# Altium PCB Modulo Bluetooth.PcbDoc
Units mm, origin at the board's own origin, x right, y up, seen from the top; angles counter-clockwise.
Board outline 152.4 x 101.6 mm, 2 copper layers (Top Layer, Bottom Layer); 31 components, 26 nets, 106 pads, 156 vias.
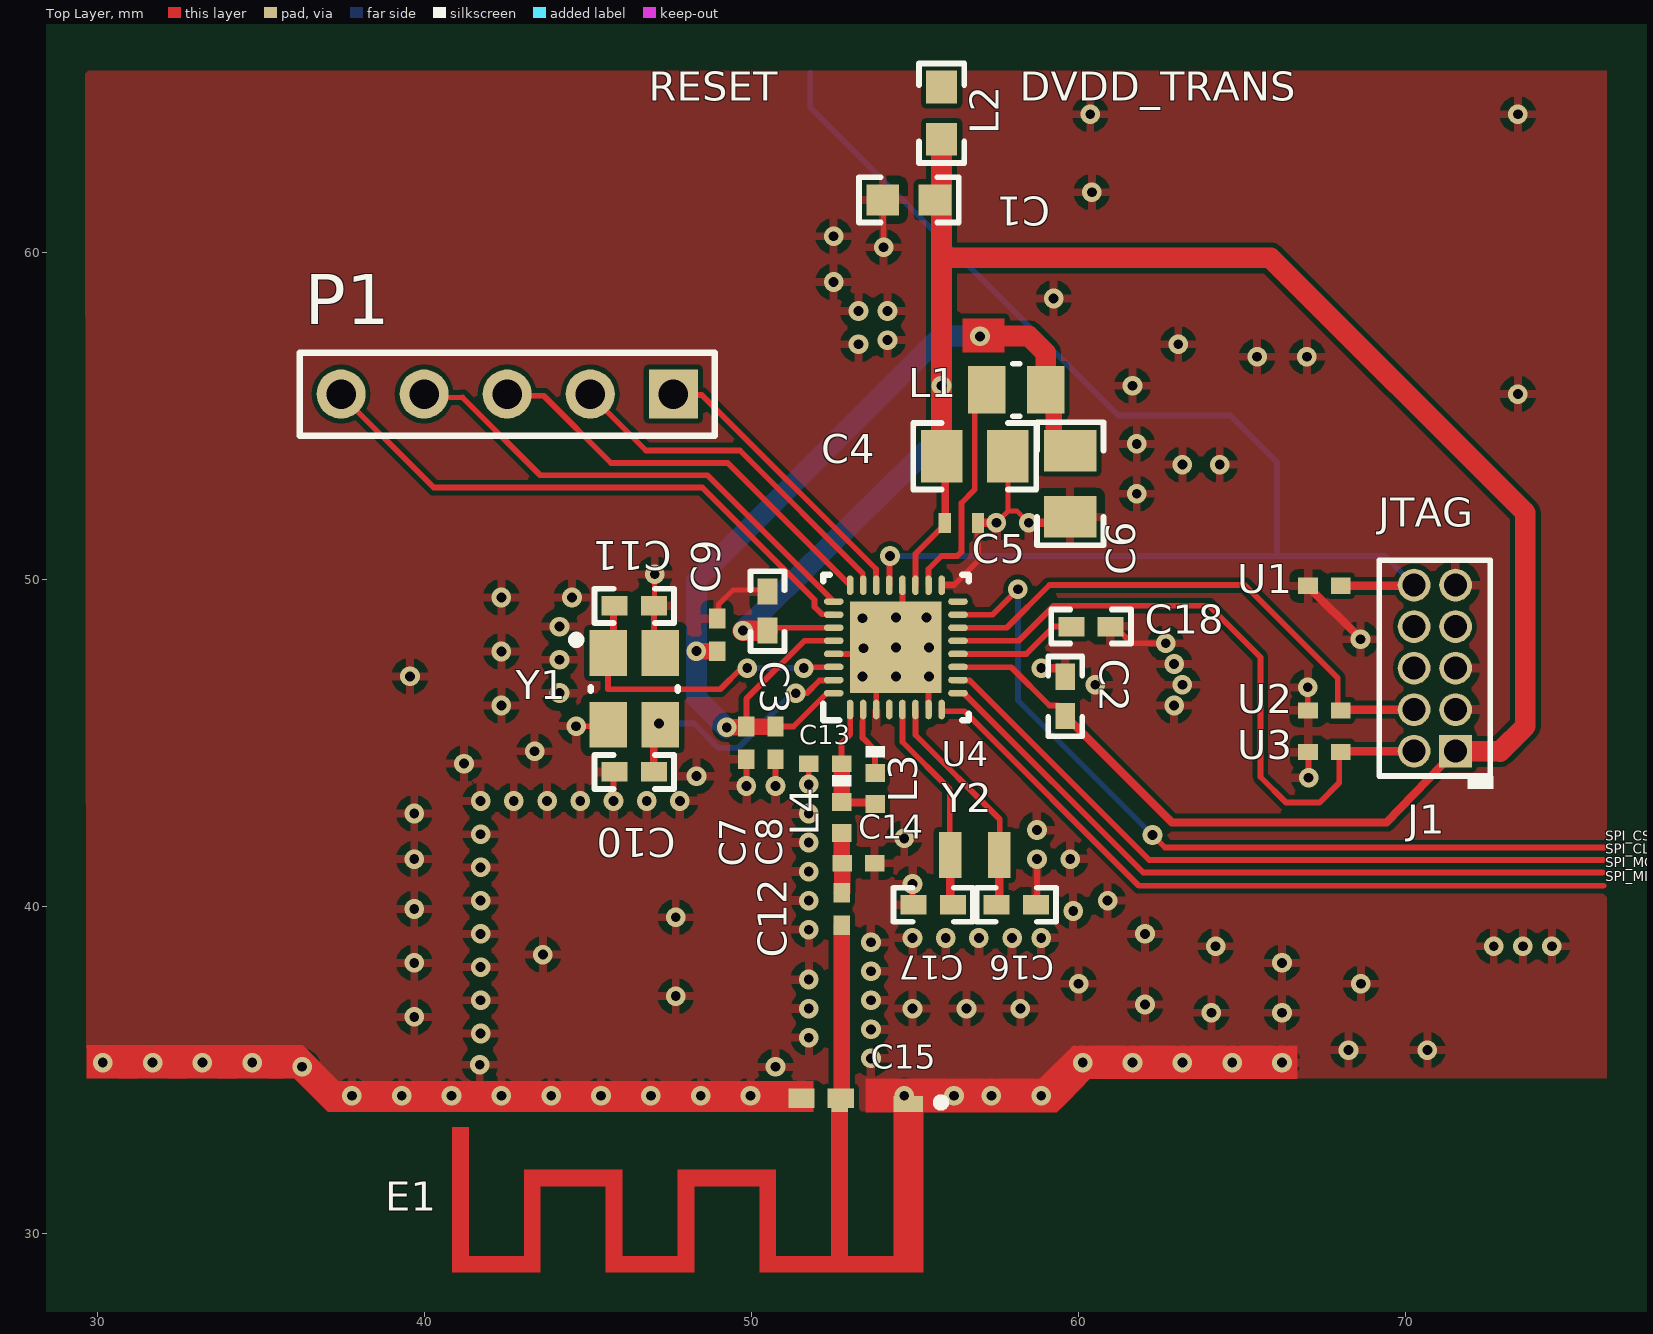
[diagram p0: Top Layer view]
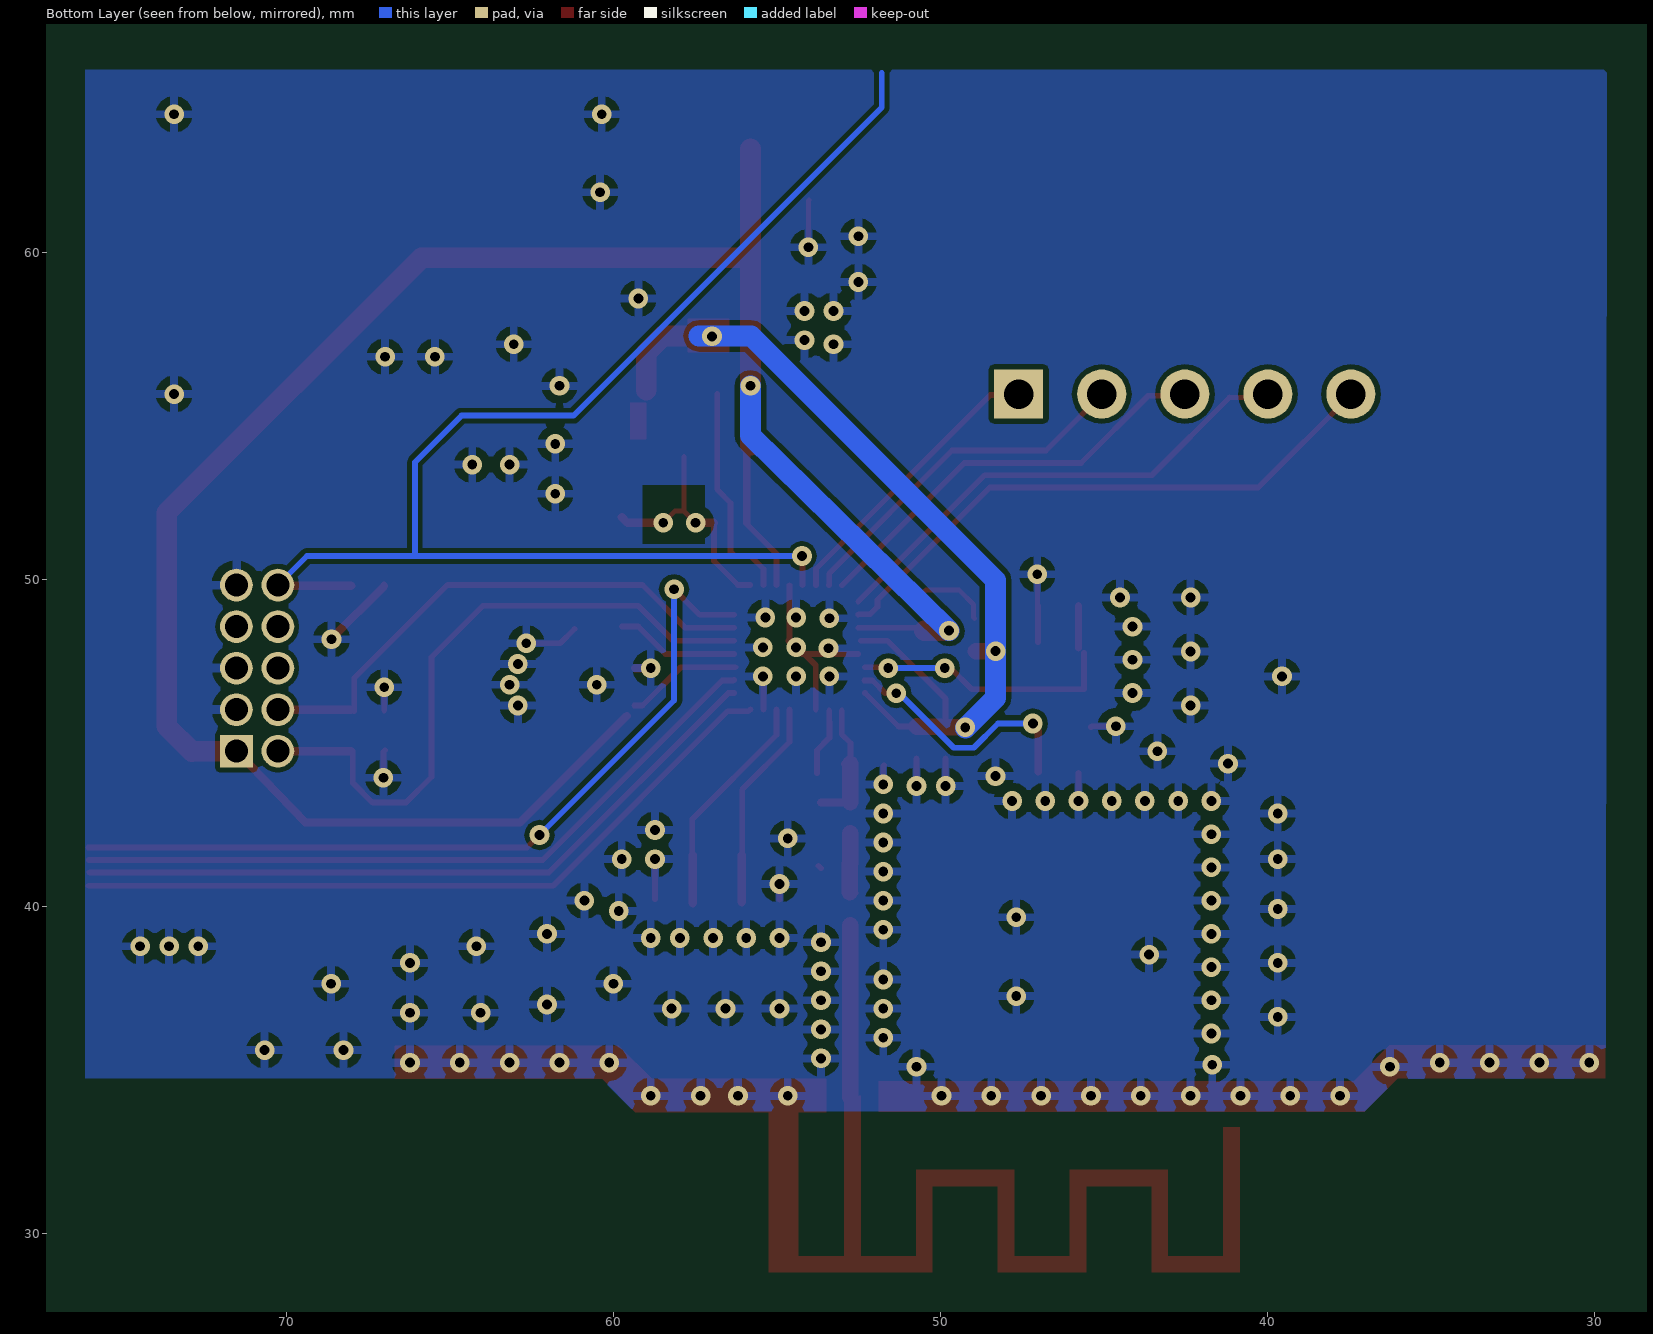
[diagram p1: Bottom Layer view, seen from below]

## Layer stack, top to bottom
Top Solder: solder mask 0.0102, Solder Resist, Dk 3.5
Top Layer: signal copper 0.0356
Dielectric 1: dielectric 0.32, FR-4, Dk 4.8
Bottom Layer: signal copper 0.0356
Bottom Solder: solder mask 0.0102, Solder Resist, Dk 3.5

## Board outline
25.4,25.4 177.8,25.4 177.8,127 25.4,127

## Design rules (kind name [scope] priority, off if disabled: settings)
Clearance [All] p1: gap=0.152 ignorepadtopadclearanceinfootprint=FALSE
ComponentClearance [All] p1 off: gap=0.254 collisioncheckmode=3 verticalgap=0.254 showdistances=FALSE
PolygonConnect [All] p1: connectstyle=Relief reliefconductorwidth=0.254 reliefentries=4 polygonreliefangle="90 Angle" airgapwidth=0.254
RoutingVias [All] p1: holewidth=0.3 width=0.6 viastyle="Through Hole" minholewidth=0.3 minwidth=0.6 maxholewidth=6.3 maxwidth=6.6
SolderMaskExpansion [All] p1: expansion=0.102
Width [All] p1: maxlimit=2 minlimit=0.152 preferedwidth=0.152
29 further rules are at their usual default settings.

## Components (designator, comment, footprint, x,y, rotation, side; value= is the part's Value field where it differs from the comment)
C1 "10uF" 0603 54.825,61.6 r0 top
C2 "0.1uF" 0402 59.607,46.415 r90 top
C3 "0.1uF" 0402 50.5,49.025 r90 top
C4 "10uF" 0805_HV 56.838,53.756 r0 top
C5 "0.1uF" 0402S 56.429,51.724 r0 top
C6 "10uF" 0805_HV 59.759,52.918 r270 top
C7 "0.1uF" 0402L 49.853,44.993 r270 top
C8 "0.1uF" 0402L 50.742,44.993 r270 top
C9 "" 0402L 48.964,48.295 r270 top value=10uF
C10 "" 0402 46.424,44.104 r180 top value=12pF (schematic designator C11)
C11 "" 0402 46.424,49.184 r0 top value=12pF (schematic designator C10)
C12 "GRM1555C1H120JA01D" 0402L 52.774,39.913 r90 top value=12pF
C13 "GRM1555C1H1R2CA01D" 0402L 52.266,44.358 r180 top value=1.2pF
C14 "GRM1555C1H1R2CA01D" 0402L 53.282,41.31 r0 top value=1.2pF
C15 "GRM1555C1H1R2CA01D" 0402 52.139,34.122 r0 top value=1.2pF
C16 "GRM1555C1H120JA01D" 0402 58.108,40.04 r0 top value=12pF (schematic designator C17)
C17 "GRM1555C1H120JA01D" 0402 55.568,40.04 r0 top value=12pF (schematic designator C16)
C18 "GRM155R61A105KE15D" 0402 60.394,48.549 r180 top value=1uF
E1 "ANTENNA_IIFA" ANTENNA_IIFA 54.806,34.198 r180 top net-tie
J1 "" CONN_GRPB052VWVN-RC 70.91,47.279 r90 top
L1 "" 0805_145 58.108,55.788 r0 top value=10uH
L2 "BLM18HE152SN1D" 0603 55.825,64.25 r270 top value="1500 ohm"
L3 "LQG15HS15NJ02D" IND_LQG15H 53.79,43.596 r270 top value=15nH
L4 "LQG15HS2N0S02D" IND_LQG15H 52.774,42.707 r270 top value=2nH
P1 "Header 5" HDR1X5 47.618,55.661 r180 top
U1 "TPD1E10B06DPYR" DPY0002A 67.531,49.794 r180 top
U2 "TPD1E10B06DPYR" DPY0002A 67.531,45.984 r180 top
U3 "TPD1E10B06DPYR" DPY0002A 67.531,44.714 r180 top
U4 "*" RSM0032B_NV 54.425,47.914 r90 top value=Value
Y1 "TSX-3225 24.0000MF20G-AC0-ND" EPSON_TSX-3225 46.424,46.644 r0 top
Y2 "FC-12M 32.7680KA-A3" Epson_FC-12M 56.838,41.564 r0 top

## Footprints (in the part's own frame and the unit in brackets; to place one, negate y for a bottom-side part, rotate by r counter-clockwise, add the part's x,y. Pads: shape width x height; smd on the part's side, far side on the other; paste and mask are expansions set on the pad)
0402 [mm] "0402 from SM-752 data"
  rect 0.8x0.6 smd: 1(-0.6,0) 2(0.6,0)
  silkscreen extent -1.22,-0.52 1.22,0.52, body extent -0.55,-0.3 0.55,0.3, height 0.6
0402L [mm] "0402 from SM-752 data"
  rect 0.6x0.5 smd: 1(-0.5,0) 2(0.5,0)
  body extent -0.55,-0.3 0.55,0.3, height 0.6
0402S [mil] "Based on C0402S footprint from PADS legacy"
  rect 15x24 smd: 1(-20,0) 2(20,0)
  body extent -22,-12 22,12, height 24
0603 [mm] "0603 from SM-752 data"
  rect 1x0.95 smd: 1(-0.8,0) 2(0.8,0)
  silkscreen extent -1.52,-0.69 1.52,0.69, body extent -0.87,-0.47 0.87,0.47, height 1
0805_145 [mm] "0805 / 1.45mm height"
  rect 1.15x1.45 smd: 1(-0.9,0) 2(0.9,0)
  silkscreen extent -0.1,-0.8 0.1,0.8, body extent -1.1,-0.72 1.1,0.72, height 1.45
0805_HV [mil] "0805 with 30mil clearance between pads"
  rect 50x63 smd: 1(-40,0) 2(40,0)
  silkscreen extent -74,-40 74,40, body extent -43,-29 43,29, height 57
ANTENNA_IIFA [mm] "PCB Antenna, 2-Leads"
  rect 0.9x0.5 smd paste-1 mask-1: 1(0,0.25)
  rect 0.5x0.5 smd paste-1 mask-1: 2(2.1,0.25)
  Top Layer region: -0.45,0 -0.45,5.4 4.55,5.4 4.55,2.76 6.55,2.76 6.55,5.4 9.25,5.4 9.25,2.76 11.25,2.76 11.25,5.4 13.95,5.4 13.95,0.96 13.45,0.96 13.45,4.9 11.75,4.9 11.75,2.26 8.75,2.26 8.75,4.9 7.05,4.9 7.05,2.26 4.05,2.26 4.05,4.9 2.35,4.9 2.35,0 1.85,0 1.85,4.9 0.45,4.9 0.45,0
  silkscreen extent -1.1,0.11 -0.9,0.31
CONN_GRPB052VWVN-RC [mm] "SULLINS"
  rect 1x1 hole 0.7 mask+0.08: 1(-2.54,-0.635)
  round 1 hole 0.7 mask+0.08: 2(-2.54,0.635) 3(-1.27,-0.635) 4(-1.27,0.635) 5(0,-0.635) 6(0,0.635) 7(1.27,-0.635) 8(1.27,0.635) 9(2.54,-0.635) 10(2.54,0.635)
  silkscreen extent -3.7,-1.8 3.3,1.7, body extent -3.17,-1.7 3.17,1.7, height 4
DPY0002A [mm] "R-PX2SON-N2"
  rect 0.6x0.5 smd: 1(-0.5,0) 2(0.5,0)
  body extent -0.55,-0.35 0.55,0.35, height 0.4
Epson_FC-12M [mm] "Epson"
  rect 0.7x1.4 smd: 1(-0.75,0) 2(0.75,0)
  body extent -1.05,-0.63 1.05,0.63, height 0.6
EPSON_TSX-3225 [mm] "SMD, 4-Leads, Body 2.65x3.35mm, Height 0.6mm"
  rect 1.15x1.4 smd: 1(-0.8,1.1) 2(-0.8,-1.1) 3(0.8,-1.1) 4(0.8,1.1)
  silkscreen extent -1.9,-0.05 1.33,1.62, body extent -1.33,-1.68 1.33,1.68, height 0.61
HDR1X5 [mm] "Connector; Header; 5 Position"
  rect 1.5x1.5 hole 0.9: 1(0,0)
  round 1.5 hole 0.9: 2(2.54,0) 3(5.08,0) 4(7.62,0) 5(10.16,0)
  silkscreen extent -1.27,-1.27 11.43,1.27
IND_LQG15H [mm] "MuRata"
  rect 0.55x0.6 smd: 1(-0.475,0) 2(0.475,0)
  silkscreen extent -1.3,-0.3 -0.95,0.3, body extent -0.52,-0.27 0.52,0.27, height 0.55
RSM0032B_NV [mm]
  oval 0.6x0.2 smd paste+0 mask+0.051: 1(-1.9,1.4) 2(-1.9,1) 3(-1.9,0.6) 4(-1.9,0.2) 5(-1.9,-0.2) 6(-1.9,-0.6) 7(-1.9,-1) 8(-1.9,-1.4) 17(1.9,-1.4) 18(1.9,-1) 19(1.9,-0.6) 20(1.9,-0.2) 21(1.9,0.2) 22(1.9,0.6) 23(1.9,1) 24(1.9,1.4)
  oval 0.2x0.6 smd paste+0 mask+0.051: 9(-1.4,-1.9) 10(-1,-1.9) 11(-0.6,-1.9) 12(-0.2,-1.9) 13(0.2,-1.9) 14(0.6,-1.9) 15(1,-1.9) 16(1.4,-1.9) 25(1.4,1.9) 26(1,1.9) 27(0.6,1.9) 28(0.2,1.9) 29(-0.2,1.9) 30(-0.6,1.9) 31(-1,1.9) 32(-1.4,1.9)
  rect 2.8x2.8 smd paste-1.387 mask+0.051: 33(0,0)
  silkscreen extent -2.23,-2.23 2.23,2.23, body extent 0,0 0.25,0.25, height 0.25

## Part data
C1: library part C1608X5R1A106M08, "Imported", Manufacturer_Part_Number=C1608X5R1A106M080AC, C="Copyright (C) 2015 Accelerated Designs. All rights reserved", Copyright="Copyright (C) 2015 Accelerated Designs. All rights reserved", Vendor=TDK
C2 C3 C4 C5 C6 C7 C8: library part GRM155R71A104KA0, "Imported", Manufacturer_Part_Number=GRM155R71A104KA01D, Value1=10V, C="Copyright (C) 2015 Accelerated Designs. All rights reserved", Copyright="Copyright (C) 2015 Accelerated Designs. All rights reserved", Vendor=Murata
C9 C10 C11: library part "Cap Semi", "Capacitor (Semiconductor SIM Model)", LatestRevisionDate=29-May-2009, LatestRevisionNote="IPC-7351 Footprint Added.", PackageDescription="Chip Capacitor", PackageReference=C1206, Published=8-Jun-2000, Publisher="Altium Limited"
C12 C16 C17: "CAP, CERM, 12 pF, 50 V, +/- 5%, C0G/NP0, 0402", Cap_Case=0402, Manufacturer=MuRata, Supplier Part Number 1=81-GRM1555C1H120JA1D, TempCo=C0G/NP0, Tolerance_%=5, Value1=Unknown, Value2=50V, ValueDisplayed=12pF, AEC Category=Q200, AEC Qualified=?, Cap_F=0.000000000012, ComponentLink1Description="Datasheet link", ComponentLink1URL=http://search.murata.co.jp/Ceramy/PnsearchViewAction.do?HnOFG=ON&HnNFG=ON&SEL_CNT=50&sLang=en&sKey=GRM1555C1H120JA01D&x=9&y=9&search=startwith, CompType=Capacitor, LatestRevisionDate=2016-02-01, MountType=SMT, PackageReference=0402, PartNumber=GRM1555C1H120JA01D, Polarized=N, Published=2008-06-19, Publisher="Texas Instruments", RoHS=Y, Supplier 1=Mouser, Supplier 2=Farnell, Supplier 3=Newark, Supplier Part Number 2=1828875, Supplier Part Number 3=14T3292, SymbolVersion=2008-07-09, TaMax_C=125, TaMin_C=-55, Technology=Ceramic, U/M=EA, VDC_V=50
C13 C14 C15: "CAP, CERM, 1.2 pF, 50 V, +/- 5%, C0G/NP0, 0402", Cap_Case=0402, Manufacturer=MuRata, Supplier Part Number 1=81-GRM1555C1H1R2CA1D, TempCo=C0G/NP0, Tolerance_%=5, Value1=Unknown, Value2=50V, ValueDisplayed=1.2pF, AEC Category=Q200, AEC Qualified=?, Cap_F=0.0000000000012, ComponentLink1Description="Datasheet link", ComponentLink1URL=http://search.murata.co.jp/Ceramy/image/img/PDF/ENG/GRM1555C1H1R2CA01.pdf, CompType=Capacitor, LatestRevisionDate=2016-02-01, MountType=SMT, PackageReference=0402, PartNumber=GRM1555C1H1R2CA01D, Polarized=N, Published=2008-06-19, Publisher="Texas Instruments", RoHS=Y, Supplier 1=Mouser, SymbolVersion=2008-07-09, TaMax_C=125, TaMin_C=-55, Technology=Ceramic, U/M=EA, VDC_V=50
C18: "CAP, CERM, 1 µF, 10 V, +/- 10%, X5R, 0402", Cap_Case=0402, Manufacturer=MuRata, Supplier Part Number 1=490-3890-1-ND, TempCo=X5R, Tolerance_%=10, Value1=Unknown, Value2=10V, ValueDisplayed=1µF, AEC Category=Q200, AEC Qualified=?, Cap_F=0.000001, ComponentLink1Description="Datasheet link", ComponentLink1URL=http://search.murata.co.jp/Ceramy/PnsearchViewAction.do?HnOFG=ON&HnNFG=ON&SEL_CNT=50&sLang=en&sKey=GRM155R61A105KE15D&x=9&y=9&search=startwith, CompType=Capacitor, LatestRevisionDate=2016-01-22, MountType=SMT, PackageReference=0402, PartNumber=GRM155R61A105KE15D, Polarized=N, Published=2008-06-19, Publisher="Texas Instruments", RoHS=Y, Supplier 1=Digi-Key, Supplier 2=Mouser, Supplier 3=Farnell, Supplier Part Number 2=81-GRM155R61A105KE15, Supplier Part Number 3=1735523, SymbolVersion=2008-07-09, TaMax_C=85, TaMin_C=-55, Technology=Ceramic, U/M=EA, VDC_V=10
E1: "PCB Antenna.  There is nothing to buy or mount.", Manufacturer=N/A, ComponentLink1Description="Datasheet Link", ComponentLink1URL=http://www.ti.com/lit/an/swra117d/swra117d.pdf, CompType=Antenna, LatestRevisionDate=2015-03-27, MountType=N/A, PackageReference="PCB Antenna, 2-Leads", PartNumber=ANTENNA_IIFA, Publisher="Texas Instruments", SymbolCreator=Altium, SymbolVersion=2014-08-20
J1: library part "Header 5X2", "Header, 5-Pin, Dual row", LatestRevisionDate=17-Jul-2002, LatestRevisionNote="Re-released for DXP Platform.", Publisher="Altium Limited"
L1: library part "Inductor Iron", "Magnetic-Core Inductor", LatestRevisionDate=17-Jul-2002, LatestRevisionNote="Re-released for DXP Platform.", PackageDescription="Axial Device, Thru-Hole; 2 Leads; 0.9 in Pin Spacing", PackageReference=AXIAL-0.9, Published=24-Mar-1999, Publisher="Altium Limited"
L2: "Ferrite Bead, 1500 ohm @ 100 MHz, 0.5 A, 0603", Manufacturer=MuRata, Supplier Part Number 1=490-5216-1-ND, Value1="0.5 ohm", Value2=0.5A, ComponentLink1Description="Datasheet link", ComponentLink1URL=http://search.murata.co.jp/Ceramy/image/img/PDF/ENG/L0110S0101BLM18H.pdf, CompType="Ferrite Bead", DCR_ohm=0.5, Imax_A=0.5, LatestRevisionDate=2016-02-02, MountType=SMT, PackageReference=0603, PartNumber=BLM18HE152SN1D, Published=2014-04-30, Publisher="Texas Instruments", RoHS=Y, Supplier 1=Digi-Key, Supplier 2=Mouser, Supplier 3=Farnell, Supplier Part Number 2=81-BLM18HE152SN1D, Supplier Part Number 3=2443237RL, SymbolVersion=2009-06-02, Ztyp@1GHz_Ohm=1500, ZTyp@100MHz_Ohm=1500
L3: "Inductor, Multilayer, Air Core, 15 nH, 0.3 A, 0.32 ohm, SMD", Manufacturer=MuRata, Supplier Part Number 1=490-2625-1-ND, Value1="0.32 ohm", Value2=0.3A, ValueDisplayed=15nH, AEC Category=Q200, AEC Qualified=?, ComponentLink1Description="Datasheet link", ComponentLink1URL=http://search.murata.co.jp/Ceramy/image/img/PDF/ENG/L0075S0083LQG15HS.pdf, CompType=Inductor, DCR_ohm=0.32, Imax_A=0.3, Ind_H=15.0E-9, Irms="0.3A @ C rise", Isat="0.3A @ % inductance drop", LatestRevisionDate=2016-01-08, Material="Air Core", MountType=SMT, PackageReference="0402 polarized", PartNumber=LQG15HS15NJ02D, Published=2008-06-26, Publisher="Texas Instruments", RoHS=Y, Supplier 1=Digi-Key, Supplier 2=Mouser, Supplier Part Number 2=81-LQG15HS15NJ02D, SymbolVersion=2008-07-23, Technology=Multilayer
L4: "Inductor, Multilayer, Air Core, 2 nH, 0.3 A, 0.1 ohm, SMD", Manufacturer=MuRata, Supplier Part Number 1=490-6569-1-ND, Value1="0.1 ohm", Value2=0.3A, ValueDisplayed=2nH, AEC Category=Q200, AEC Qualified=?, ComponentLink1Description="Datasheet link", ComponentLink1URL=http://search.murata.co.jp/Ceramy/image/img/PDF/ENG/L0075S0083LQG15HS.pdf, CompType=Inductor, DCR_ohm=0.1, Imax_A=0.3, Ind_H=2.0E-9, Irms="0.3A @ C rise", Isat="0.3A @ % inductance drop", LatestRevisionDate=2016-01-08, Material="Air Core", MountType=SMT, PackageReference="0402 polarized", PartNumber=LQG15HS2N0S02D, Published=2008-06-26, Publisher="Texas Instruments", RoHS=Y, Supplier 1=Digi-Key, Supplier 2=Mouser, Supplier Part Number 2=81-LQG15HS2N0S02D, SymbolVersion=2008-07-23, Technology=Multilayer
P1: "Header, 5-Pin", LatestRevisionDate=17-Jul-2002, LatestRevisionNote="Re-released for DXP Platform.", Publisher="Altium Limited"
U1 U2 U3: "ESD in 0402 Package with 10 pF Capacitance and 6 V Breakdown, 1 Channel, -40 to +125 degC, 2-pin X2SON (DPY), Green (RoHS & no Sb/Br)", Alternate Manufacturer=None, Alternate PartNumber=Equivalent, Breakdown Voltage(Min)(V)=6, IO Capacitance(Typ)(pF)=10, Manufacturer="Texas Instruments", Supplier Part Number 1=296-30406-2-ND, ComponentLink1Description=Datasheet, ComponentLink1URL=http://www.ti.com/general/docs/lit/getliterature.tsp?genericPartNumber=TPD1E10B06&fileType=pdf, ComponentLink2Description="URL Link1", ComponentLink2URL=SamplesURL:http://www.ti.com/product/tpd1e10b06#samples, DatasheetVersion=SLLSEB1, Eco-Plan=TBD, IEC 61000-4-2 Air-Gap(+/- kV)=30, IEC 61000-4-2 Contact(+/- kV)=30, IO Leakage Current(nA)=10, MountType=SMT, PackageDescription="2-Pin Plastic Small Outline No-Lead 1.0 x 0.6 x 0.4 mm Body", PackageReference=DPY0002A, PackageVersion="revA, Apr-2010", PartNumber=TPD1E10B06DPYR, SubFamily="ESD Solution", Supplier 1=Digi-Key, Supplier 2=Digi-Key, Supplier 3=Digi-Key, Supplier 4=Newark, Supplier 5=Mouser, Supplier Part Number 2=296-30406-1-ND, Supplier Part Number 3=296-30406-6-ND, Supplier Part Number 4=94T1842, Supplier Part Number 5=595-TPD1E10B06DPYR
U4: library part CC2640R2FRSMR_1, "Imported", Manufacturer="Texas Instruments", PartNumber=CC2640R2FRSMR, RefDes=RefDes, TYPE=TYPE
Y1: library part "TSX-3225 24.0000MF20G-AC3", Supplier 1=Digikey, Supplier Part Number 1="TSX-3225 24.0000MF20G-AC0-ND"
Y2: "Crystal, 32.768kHz, 12.5pF, SMD", Frequency=32.768KHZ, Frequency Stability=±20ppm, Manufacturer=Epson, Supplier Part Number 1=SER3672CT-ND, ComponentLink1Description="Datasheet Link", ComponentLink1URL=http://www.eea.epson.com/portal/pls/portal/docs/1/1587453.PDF, CompType=Crystal, LatestRevisionDate=2015-03-19, MountType=SMT, PackageReference="Crystal 2.05x.6x1.2mm", PartNumber="FC-12M 32.7680KA-A3", Publisher="Texas Instruments", RoHS=Y, Supplier 1=Digi-Key, Supplier 2=Mouser, Supplier Part Number 2=732-FC-12M-32.76KAA3, SymbolCreator=a0412235, SymbolVersion=2008-07-09, TaMax_C=85, TaMin_C=-40, U/M=EA

## Via types
v1: diameter 0.6, hole 0.3, Top Layer to Bottom Layer, tented both sides, 156 vias

## Nets (pads, with @x,y where several pads share a name; then routed paths per layer and width w, separated by ;. In a path a pad name is that pad's centre, name@x,y a point inside that pad or via, vN(x,y) a via of type N, cw(c..) or ccw(c..) an arc to the next point about the centre after c; other vN are vias at no path point)
DCDC_SW: L1.1 U4.18 | length 6.7
  Top Layer w0.178: U4.18 55.425,50.311 55.822,50.708 56.302,50.708 56.429,50.835 56.429,52.331 56.838,52.74 L1.1@56.838,55.661
DVDD_TRANS: L2.1
GND: C1.1 C2.2 C3.2 C4.2 C5.2 C6.2 C7.2 C8.2 C9.1 C10.2 C11.2 C13.2 C14.2 C15.1 C16.2 C17.1 C18.1 E1.1 J1.3 J1.5 J1.9 U1.2 U2.2 U3.2 U4.3 U4.7 U4.17 U4.20 U4.29 U4.33 Y1.2 Y1.4 | length 31.7
  Top Layer w0.152: C11.2 47.05,49.21 v1(47.05,50.15) ; C9.1 49,48.831 49,49.225 49.45,49.675 50.45,49.675 C3.2 ; C1.1 54.05,61.575 v1(54.05,60.15) ; v1(57.5,51.724) 57.854,52.078 ; C4.2 57.854,52.078 ; v1(58.489,51.724) 58.135,52.078 57.854,52.078
  Top Layer w0.178: v1(44.646,45.501) 45.383,45.501 Y1.2@45.408,45.476 ; v1(45.789,43.215) C10.2@45.789,44.079 ; Y1.4@47.024,48.076 C11.2 ; v1(49.853,43.672) C7.2 C7.2@49.853,44.51 ; v1(50.742,43.672) C8.2 C8.2@50.742,44.51 ; C13.2@51.733,44.307 51.758,44.282 v1(51.758,43.723) ; U4.29 U4.33@54.174,47.714 ; C14.2@53.663,41.158 C14.2@53.739,41.234 ; U4.3 53.825,47.365 U4.33@54.174,47.714 ; U4.33@54.387,47.927 U4.33@54.4,47.939 ; U4.33@54.425,47.889 54.25,47.714 U4.33@54.174,47.714 ; U4.33@54.625,48.114 U4.20 ; C17.1@54.933,40.192 v1(54.933,40.675) ; U4.7 U4.33@55.425,46.99 ; U4.17@55.83,49.819 56.203,49.819 56.937,50.553 C5.2 ; C16.2@58.743,40.218 v1(58.743,41.437) ; C18.1@61.207,48.473 61.639,48.041 v1(62.68,48.041) ; U3.2@66.998,44.764 67.049,44.714 v1(67.049,43.926) ; U2.2@67.023,45.984 v1(67.023,46.695)
  Top Layer w0.254: v1(54.425,47.914) U4.33@54.625,48.114 ; U4.33@55.416,47 U4.33@55.425,46.99 ; C5.2 v1(57.5,51.724) ; v1(58.489,51.724) 59.581,51.724 C6.2 ; v1(58.87,47.279) C2.2@59.343,47.279 ; U1.2 67.031,49.781 68.635,48.178 v1(68.635,48.16)
  other v1: 37.788,34.198 39.312,34.198 40.836,34.198 42.36,34.198 43.884,34.198 45.408,34.198 46.932,34.198 48.456,34.198 49.98,34.198 54.679,34.198 56.203,34.198 57.346,34.198 58.87,34.198 36.264,35.087 50.742,35.087 41.7,35.15 30.168,35.214 31.692,35.214 33.216,35.214 34.74,35.214 60.14,35.214 61.664,35.214 63.188,35.214 64.712,35.214 66.236,35.214 53.663,35.341 68.268,35.595 70.681,35.595 51.758,35.976 41.725,36.103 53.663,36.23 39.693,36.611 64.077,36.738 66.236,36.738 51.758,36.865 54.933,36.865 56.584,36.865 58.235,36.865 62.045,36.992 41.725,37.119 53.663,37.119 47.694,37.246 60.013,37.627 68.649,37.627 51.758,37.754 53.663,38.008 41.725,38.135 39.693,38.262 66.236,38.262 43.63,38.516 64.204,38.77 72.713,38.77 73.602,38.77 74.491,38.77 53.663,38.897 54.933,39.024 55.949,39.024 56.965,39.024 57.981,39.024 58.87,39.024 41.725,39.151 62.045,39.151 51.758,39.278 47.694,39.659 59.85,39.85 39.693,39.913 41.725,40.167 51.758,40.167 60.902,40.167 51.758,41.056 41.725,41.183 39.693,41.437 59.759,41.437 51.758,41.945 54.679,42.072 41.725,42.199 58.743,42.326 39.693,42.834 51.758,42.834 41.725,43.215 42.741,43.215 43.757,43.215 44.773,43.215 46.805,43.215 47.821,43.215 48.329,43.977 41.217,44.358 43.376,44.739 42.36,46.136 62.934,46.136 44.138,46.517 60.521,46.771 63.188,46.771 39.566,47.025 53.409,47.025 54.425,47.025 55.441,47.025 62.934,47.406 44.138,47.533 42.36,47.787 53.434,47.889 55.441,47.914 44.138,48.549 53.409,48.803 54.425,48.828 55.365,48.828 42.36,49.438 44.519,49.438 61.791,52.613 63.188,53.502 64.331,53.502 61.791,54.137 73.45,55.661 61.664,55.915 65.474,56.804 66.998,56.804 53.282,57.185 63.061,57.185 54.171,57.312 53.282,58.201 54.171,58.201 59.251,58.582 52.52,59.09 52.52,60.487 60.419,61.833 60.369,64.221 73.45,64.221
JTAG_TCK: J1.4 U2.1 U4.14 | length 16.6
  Top Layer w0.178: U4.14 57.819,48.514 59.124,49.819 65.093,49.819 67.938,46.974 U2.1@67.938,45.958
  Top Layer w0.254: U2.1@68.031,46.009 J1.4
JTAG_TMS: J1.2 U3.1 U4.13 | length 20.2
  Top Layer w0.178: U4.13 58.181,48.114 59.251,49.184 64.001,49.184 65.576,47.609 65.576,43.952 66.363,43.164 67.379,43.164 67.989,43.774 67.989,44.671 U3.1
  Top Layer w0.254: U3.1@68.031,44.739 J1.2
NetC10_1: C10.1 U4.31 Y1.3 | length 7.8
  Top Layer w0.178: v1(51.362,46.511) 51.701,46.511 52.093,46.903 U4.31@52.342,46.903
  Top Layer w0.229: C10.1 47.024,45.344 Y1.3
  Bottom Layer w0.178: v1(47.185,45.585) 48.251,45.585 48.992,44.844 49.602,44.844 51.269,46.511 v1(51.362,46.511)
NetC11_1: C11.1 U4.30 Y1.1 | length 9.3
  Top Layer w0.178: Y1.1 45.624,46.631 49.053,46.631 49.701,47.279 v1(49.878,47.279) ; v1@51.629,47.303 U4.30@52.317,47.303
  Top Layer w0.229: Y1.1@45.789,47.909 C11.1@45.789,49.184
  Bottom Layer w0.178: v1(49.878,47.279) v1(51.606,47.279)
NetC12_1: C12.1 C15.2 E1.2 | length 5.3
  Top Layer w0.254: C15.2@52.612,34.122 C15.2@52.647,34.157 ; 52.639,38.516 52.647,38.524
  Top Layer w0.508: C15.2@52.774,34.157 C12.1
NetC12_2: C12.2 C14.1 L4.2 | length 1.8
  Top Layer w0.254: C12.2@52.647,40.413 C12.2@52.655,40.421 ; C14.1@52.647,41.318 C14.1@52.655,41.31
  Top Layer w0.508: C14.1@52.774,41.318 L4.2 ; C12.2@52.782,40.421 C14.1
NetC13_1: C13.1 L3.2 L4.1 U4.1 | length 4.3
  Top Layer w0.178: C13.1 52.766,44.985 53.028,45.247 U4.1@53.028,45.984
  Top Layer w0.254: C13.1@52.639,44.358 C13.1@52.647,44.35 ; L4.1@52.766,43.301 52.647,43.182 52.657,43.172 L3.2@53.663,43.172 ; C13.1 C13.1@52.929,44.358
  Top Layer w0.508: L4.1 C13.1@52.774,44.35
NetC16_2: C16.1 U4.6 Y2.2 | length 7
  Top Layer w0.178: U4.6 55.025,45.231 57.6,42.656 Y2.2@57.6,41.589
  Top Layer w0.254: C16.1@57.588,40.087 Y2.2
NetC17_1: C17.2 U4.5 Y2.1 | length 6.5
  Top Layer w0.178: U4.5 54.625,45.022 56.076,43.571 Y2.1@56.076,41.576
  Top Layer w0.254: C17.2@56.088,40.12 Y2.1
NetC18_2: C18.2 U4.12 | length 3.8
  Top Layer w0.178: U4.12 58.416,47.714 59.251,48.549 C18.2@59.759,48.549
NetL3_1: L3.1 U4.2 | length 2.1
  Top Layer w0.178: U4.2@53.414,45.984 53.414,45.653 53.409,45.648 53.409,45.145 53.79,44.764 L3.1
NetP1_1: P1.1 U4.22 | length 8.9
  Top Layer w0.178: P1.1@47.643,55.636 48.488,55.636 53.814,50.309 53.814,49.825 U4.22
NetP1_2: P1.2 U4.23 | length 11
  Top Layer w0.178: P1.2@45.052,55.661 46.78,53.934 49.655,53.934 53.414,50.175 53.414,49.825 U4.23
NetP1_3: P1.3 U4.24 | length 12.9
  Top Layer w0.178: P1.3@42.563,55.61 43.659,55.61 45.714,53.556 49.283,53.556 U4.24
NetP1_4: P1.4 U4.25 | length 15
  Top Layer w0.152: P1.4@40.099,55.559 41.17,55.559
  Top Layer w0.178: 41.17,55.559 43.551,53.178 48.661,53.178 U4.25
NetP1_5: P1.5 U4.26 | length 18
  Top Layer w0.178: P1.5@37.458,55.636 40.293,52.8 48.504,52.8 51.936,49.369 51.936,49.153 52.164,48.925 52.514,48.925 U4.26
NetU4_8: U4.8 | length 22.5
  Top Layer w0.178: U4.8 55.881,45.958 56.523,45.958 61.857,40.624 76.066,40.624
NetU4_9: U4.9 | length 22
  Top Layer w0.178: U4.9 56.502,46.514 61.99,41.026 ; 61.994,41.031 76.034,41.031 76.037,41.034
NetU4_10: U4.10 | length 22
  Top Layer w0.178: U4.10 56.336,46.903 56.686,46.903 62.177,41.412 76.05,41.412
NetU4_15: U4.15 | length 25.4
  Top Layer w0.178: U4.15 57.381,48.914 v1(58.159,49.692) ; v1(62.274,42.174) 62.658,41.789 76.075,41.789
  Bottom Layer w0.178: v1(58.159,49.692) 58.159,46.288 v1(62.274,42.174) v1@62.299,42.148
nRESET: J1.10 U1.1 U4.21 | length 42.1
  Top Layer w0.178: U4.21@54.234,49.814 v1@54.234,50.683
  Top Layer w0.254: U1.1 J1.10@70.241,49.794
  Bottom Layer w0.178: 51.809,65.485 51.809,64.424 61.232,55.001 64.661,55.001 66.084,53.578 66.084,50.733 ; v1(54.247,50.708) 69.386,50.708 J1.10
VDDR: C6.1 C7.1 C8.1 C9.2 L1.2 U4.28 U4.32 | length 28.5
  Top Layer w0.178: C7.1 49.853,46.339 51.631,48.117 U4.28@52.444,48.117 ; C8.1 51.293,45.493 U4.32@52.317,46.517
  Top Layer w0.508: v1(48.325,47.8) C9.2@48.925,47.8 ; v1(49.253,45.466) 49.853,45.477 C8.1
  Top Layer w0.635: v1@57.219,57.439 58.489,57.439 59.008,56.92 L1.2
  Bottom Layer w0.635: v1@49.243,45.45 48.325,46.369 v1(48.325,47.8) 48.325,49.967 55.797,57.439 57.397,57.439
  other v1: 57,57.425
VDDS: C1.2 C2.1 C3.1 C4.1 C5.1 J1.1 L2.2 U4.11 U4.19 U4.27 | length 74.2
  Top Layer w0.178: C3.1@50.5,48.514 U4.27 ; U4.19 55.025,50.775 C5.1@55.898,51.648 ; U4.11@56.279,47.304 57.956,47.304 59.124,46.136 C2.1@59.378,46.136
  Top Layer w0.229: C5.1@55.929,51.724 C4.1@55.929,53.99
  Top Layer w0.254: C2.1 62.867,42.555 69.436,42.555 J1.1
  Top Layer w0.635: v1(49.75,48.425) C3.1 ; C4.1@55.822,54.097 v1(55.822,55.915) 55.822,59.827 ; L2.2@55.822,63.154 55.822,59.827 ; J1.1 72.902,44.725 73.678,45.501 73.678,52.029 65.88,59.827 55.822,59.827
  Bottom Layer w0.635: v1(49.75,48.425) 55.822,54.391 v1(55.822,55.915)
pads on no net: J1.6 J1.7 J1.8 U4.4 U4.16

## Polygon pours and split planes (outlines as drawn)
GND on Bottom Layer "Bottom Layer-GND" (solid, remove dead copper, pour order 20): 29.662,34.725 36.038,34.725 37.038,33.725 59.396,33.725 60.387,34.729 76.162,34.729 76.162,65.579 75.962,65.579 75.562,65.579 29.638,65.579
GND on Top Layer "Top Layer-GND" (solid, remove dead copper, pour order 22): 29.662,34.725 36.038,34.725 37.038,33.725 59.396,33.725 60.387,34.729 76.162,34.729 76.162,65.054 76.162,65.554 75.537,65.554 29.638,65.554

## Other copper
Top Layer:
  region net VDDR: 57.752,56.931 57.752,57.972 56.457,57.972 56.457,56.931
  rectangle net VDDR: 58.997,54.264 59.505,55.407
  region net GND: 53.498,33.7 53.498,34.716 58.832,34.716 59.848,35.732 66.706,35.732 66.706,34.716 60.356,34.716 59.34,33.7
  region net GND: 51.901,34.65 51.901,33.715 37.042,33.715 36.026,34.731 29.676,34.731 29.676,35.747 36.28,35.747 37.377,34.65
Bottom Layer:
  pour cut-out: 57.219,52.867 59.124,52.867 59.124,51.089 57.219,51.089

## Silkscreen, mask and mechanical layers (free items; w line width, h text height)
Top Overlay:
  text "RESET" at 46.86,64.335 h1.52
  text "DVDD_TRANS" at 58.21,64.335 h1.52
  text "JTAG" at 69.182,51.318 h1.52
  text "SPI_CS" at 76.117,41.894 h0.51
  text "SPI_CLK" at 76.117,41.488 h0.51
  text "SPI_MOSI" at 76.117,41.081 h0.51
  text "SPI_MISO" at 76.117,40.65 h0.51